# Altium PCB V2.PcbDoc
Units mil, origin at the board's own origin, x right, y up, seen from the top; angles counter-clockwise.
Board outline 1188.05 x 6359.78 mil, 2 copper layers (Top Layer, Bottom Layer); 71 components, 48 nets, 205 pads, 238 vias.
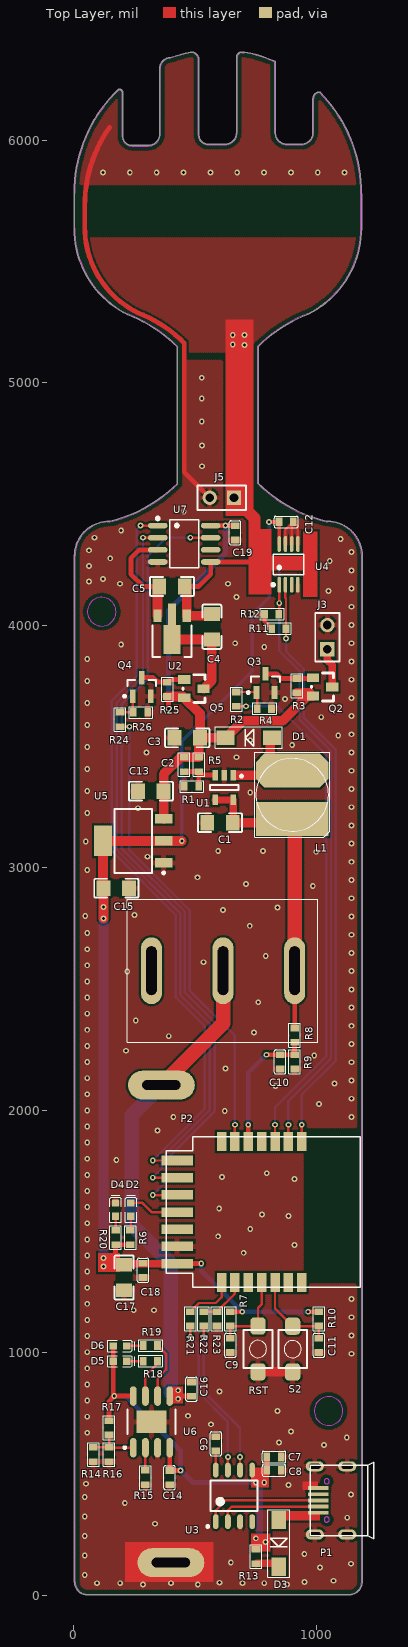
[diagram p0: Top Layer view]
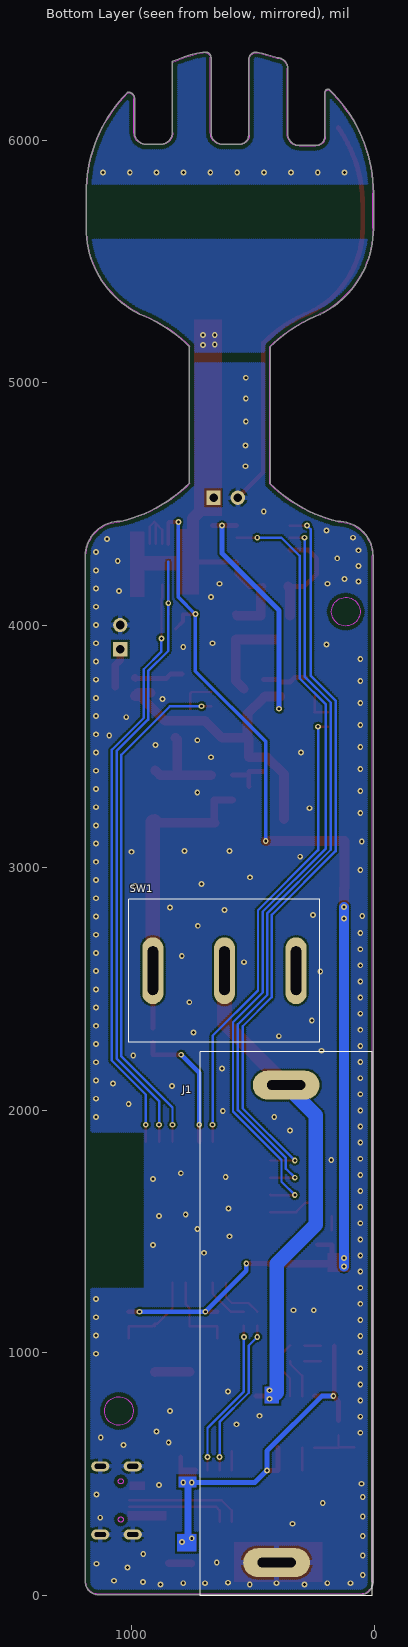
[diagram p1: Bottom Layer view, seen from below]

## Layer stack, top to bottom
Top Solder: solder mask 0.4, Solder Resist, Dk 3.5
Top Layer: signal copper 1.4
Dielectric 1: dielectric 12.6, FR-4, Dk 4.8
Bottom Layer: signal copper 1.4
Bottom Solder: solder mask 0.4, Solder Resist, Dk 3.5

## Board outline
4.17,4285.47 cw(c146.69,4285.47) 137.6,4427.7 cw(c138.77,4425.47) 138.77,4427.99 151.9,4427.99 ccw(c6.69,5007.56) 428.44,4584.34 428.44,5146.56 ccw(c6.69,4723.34) 222.52,5280.48 cw(c223.42,5282.83) 222.31,5280.58 cw(c398.47,5635.47) 2.26,5635.47 2.26,5780 cw(c594.77,5780.23) 186.02,6209.17 cw(c187.75,6207.35) 187.75,6209.86 cw(c187.75,6194.03) 203.59,6194.03 203.59,6013.93 ccw(c239.77,6013.93) 239.77,5977.74 308.55,5977.74 ccw(c308.55,6025.23) 356.04,6025.23 356.04,6294.85 cw(c358.14,6296.24) 355.62,6296.3 cw(c399.77,6295.23) 398.74,6339.38 cw(c594.77,5780.23) 483.13,6362.13 cw(c484.77,6360.23) 484.77,6362.74 cw(c484.77,6330.23) 517.29,6330.23 517.29,6020.23 ccw(c554.77,6020.23) 554.77,5982.74 624.77,5982.74 ccw(c624.77,6030.23) 672.26,6030.23 672.26,6340.23 cw(c694.77,6340.23) 694.77,6362.74 704.77,6362.74 cw(c704.77,6360.23) 705.24,6362.7 cw(c594.83,5780.56) 831.34,6323.83 cw(c830.34,6321.52) 832.85,6321.52 cw(c830.34,6321.52) 832.29,6319.94 832.29,6030.23 ccw(c879.77,6030.23) 879.77,5982.74 939.77,5982.74 ccw(c939.77,6030.23) 987.26,6030.23 987.26,6170.23 cw(c1014.77,6170.23) 1014.77,6197.74 cw(c1014.77,6195.23) 1017.08,6196.24 cw(c594.83,5780.56) 1187.35,5780.56 cw(c594.83,5780.56) 1187.34,5777.68 cw(c1185.05,5776.65) 1187.56,5776.65 1187.56,5636.9 cw(c791.35,5636.9) 967.52,5282 cw(c966.4,5284.25) 967.31,5281.91 ccw(c1183.14,4724.77) 761.39,5147.99 761.39,4585.76 ccw(c1183.14,5008.98) 1042.38,4428.31 cw(c1041.78,4425.87) 1043.14,4427.99 1047.79,4427.99 cw(c1047.79,4285.47) 1190.3,4285.47 1190.3,51.57 cw(c1187.79,51.57) 1190.07,50.51 cw(c1137.79,55.47) 1142.75,3.19 cw(c1141.69,5.47) 1141.69,2.96 56.69,2.96 cw(c56.69,55.47) 4.17,55.47

## Design rules (kind name [scope] priority, off if disabled: settings)
BoardOutlineClearance [All] p1: gap=10 except(0: Arc-SplitContinuation Track-SplitContinuation SMDPad-SplitContinuation THPad-SplitContinuation Via-SplitContinuation Fill-SplitContinuation Poly-SplitContinuation Region-SplitContinuation Text-SplitContinuation)
Clearance outline [InPoly vs OnLayer('Keep-Out Layer')] p1: gap=15
Clearance same-via [IsVia vs IsVia] p2: gap=0 except(3: SMDPad-Via; 6: Via-Via)
Clearance [All] p3: gap=8
ComponentClearance [All] p1: gap=0 collisioncheckmode=3 verticalgap=0 showdistances=FALSE
MinimumSolderMaskSliver [All] p1: minsoldermaskwidth=3
PolygonConnect IsPad [IsPad] p1: connectstyle=Relief reliefconductorwidth=20 reliefentries=4 polygonreliefangle="90 Angle" airgapwidth=10
PolygonConnect Other [All] p2: connectstyle=Direct reliefconductorwidth=10 reliefentries=4 polygonreliefangle="90 Angle" airgapwidth=10
RoutingVias [All] p1: holewidth=8 width=16 viastyle="Through Hole" minholewidth=7.87 minwidth=11.81 maxholewidth=23.62 maxwidth=39.37
SilkToSilkClearance [All] p1: silktosilkclearance=0
SilkToSolderMaskClearance [IsPad] p1: minsilkscreentomaskgap=0 clearancetoexposedcopper=TRUE
SolderMaskExpansion [All] p1: expansion=2
Width [All] p1: maxlimit=196.85 minlimit=6 preferedwidth=7
26 further rules are at their usual default settings.

## Components (designator, comment, footprint, x,y, rotation, side; value= is the part's Value field where it differs from the comment)
C1 "22uF" C1206 604.19,3185.47 r180 top
C2 "101" C0603 456.69,3425.47 r270 top
C3 "22uF" C1206 469.19,3535.47 r180 top
C4 "22uF" C1206 570.69,3993.47 r90 top
C5 "22uF" C1206 406.19,4159.47 r0 top
C6 "0.1uF/50V" C0603_GRM18 586.69,625 r90 top
C7 "0.1uF/50V" C0603_GRM18 826.69,570.47 r180 top
C8 "1uF/16V" C0603_GRM18 826.69,515.47 r180 top
C9 "0.1uF/50V" C0603_GRM18 646.69,1030.94 r270 top
C10 "0.1uF/50V" C0603_GRM18 851.69,2199.53 r90 top
C11 "0.1uF/50V" C0603_GRM18 1011.69,1030.94 r270 top
C12 "0.1uF/50V" C0603_GRM18 876.69,4425.47 r180 top
C13 "22uF" C1206 319.19,3315.47 r180 top
C14 "4.7uF/10V" C0603_GRM18 396.21,485.47 r90 top
C15 "22uF" C1206 176.69,2915.47 r0 top
C16 "4.7uF/10V" C0603_GRM18 486.69,850.47 r270 top
C17 "22uF" C1206 208.69,1310.47 r270 top
C18 "0.1uF/50V" C0603_GRM18 286.69,1340.47 r270 top
C19 "0.1uF/50V" C0603_GRM18 666.69,4380.47 r270 top
D1 "D-B140-13" XF-SS12C 818.69,3535.47 r180 top
D2 "LED_灯_黄" LED0603 236.69,1590.47 r90 top
D3 "D-B140-13" XF-SS12C 846.69,310.47 r270 top
D4 "LED_灯_蓝" LED0603 173.69,1590.47 r90 top
D5 "LED_灯_红" LED0603 191.69,965.47 r0 top
D6 "LED_灯_绿" LED0603 191.69,1028.47 r0 top
J1 "PAD" POW_5# 716.65,2241.77 r270 bottom locked
J3 "PAD" HDR1X2 1046.69,3900.47 r90 top
J5 "PAD" HDR1X2 661.69,4525.47 r180 top
L1 "4.7uH" CD73 901.69,3300.47 r90 top
P1 "MUBFRSG-7H-05B0" MIRCOUSB_5PIN-A 1061.84,391.65 r90 top
P2 "CBU" CBU-PCBA 661.69,1580.47 r270 top locked
Q2 "AO3401A" SOT-23 1026.69,3745.47 r270 top
Q3 "CJ2312" SOT23-3 791.69,3760.47 r90 top
Q4 "CJ2312" SOT23-3 281.69,3745.47 r90 top
Q5 "AO3401A" SOT-23 496.53,3737.82 r270 top
R1 "103" R0603 486.69,3335.47 r0 top
R2 "103" R0603 671.69,3695 r90 top
R3 "104" R0603 921.69,3750.47 r90 top
R4 "104" R0603 787.16,3655.47 r180 top
R5 "473" R0603 516.69,3425.47 r270 top
R6 "102" R0603 234.33,1475.47 r90 top
R7 "103" R0603 646.69,1140 r90 top
R8 "104" R0603 911.69,2309.53 r90 top
R9 "104" R0603 911.69,2200 r90 top
R10 "103" R0603 1011.69,1140 r90 top
R11 "103" R0603 846.69,3985.47 r180 top
R12 "103" R0603 817.16,4045.47 r180 top
R13 "0.1Ω" R0603 752.69,160.47 r270 top
R14 "NTC" R0603 81.69,580.94 r270 top
R15 "152" R0603 296.69,485.94 r270 top
R16 "RT2" R0603 146.69,580.94 r90 top
R17 "RT1" R0603 146.69,690.94 r270 top
R18 "102" R0603 316.69,965.47 r180 top
R19 "102" R0603 316.69,1030.47 r0 top
R20 "102" R0603 173.69,1475.47 r270 top
R21 "200R" R0603 481.69,1140.47 r90 top
R22 "15K" R0603 536.69,1140.47 r90 top
R23 "22K/1%" R0603 591.69,1140.47 r90 top
R24 "103" R0603 191.69,3610.94 r90 top
R25 "103" R0603 386.69,3735.47 r90 top
R26 "104" R0603 276.21,3640.47 r180 top
RST "TSY3420-250AH" SW-PB2_SMT-3X4 760.83,1015.98 r90 top
S2 "TSY3420-250AH" SW-PB2_SMT-3X4 903.69,1015.47 r90 top
SW1 "SW-SPDT" pow_switch 321.41,2575.47 r0 bottom locked
U1 "LM2733XMFX/NOPB" SOT23-5 621.69,3330.47 r270 top
U2 "AMS1117-3.3" SOT-89C 466.69,4038.47 r180 top
U3 "CH340N" SOP-8 661.69,410.47 r90 top
U4 "TMP75AIDGKR" VSSOP-8_L3.0-W3.0-P0.65-LS5.0-BL 886.69,4250.47 r0 top
U5 "BL1117" SOT-223 246.69,3110.47 r180 top
U6 "TP4056_C725790" ESOP-8 321.69,715.47 r90 top
U7 "X9C104SIZT1" SOIC-8_L4.9-W3.9-P1.27-LS6.0-BL 456.69,4335.47 r270 top

## Footprints (in the part's own frame and the unit in brackets; to place one, negate y for a bottom-side part, rotate by r counter-clockwise, add the part's x,y. Pads: shape width x height; smd on the part's side, far side on the other; paste and mask are expansions set on the pad)
C0603 [mm]
  rect 0.7x0.9 smd paste+0 mask+0.051: 1(-0.75,0) 2(0.75,0)
  silkscreen extent -1.25,-0.6 1.25,0.6, body extent -0.9,-0.5 0.9,0.5, height 1
C0603_GRM18 [mm] "适用Murata GRM15封装"
  rect 0.7x0.9 smd paste+0 mask+0.051: 1(-0.75,0) 2(0.75,0)
  Top Layer pour cut-out: -0.254,0.602 0.254,0.602 0.254,-0.602 -0.254,-0.602
  silkscreen extent -1.25,-0.6 1.25,0.6, body extent -0.8,-0.4 0.8,0.4, height 0.8
C1206 [mil]
  rect 57x65 smd mask+2: 1(-52.5,0) 2(52.5,0)
  Top Layer pour cut-out: -18.07,39 18.07,39 18.07,-39 -18.07,-39
  silkscreen extent -91,-39 91,39, body extent -64,-32 64,32, height 75
CBU-PCBA [mm]
  rect 2x1 smd mask+0.051: 1(-7.377,7.1) 2(-7.377,5.7) 3(-7.377,4.3) 4(-7.377,2.9) 5(-7.377,1.5) 6(-7.377,0.1) 7(-7.377,-1.3) 15(7.377,-1.3) 16(7.377,0.1) 17(7.377,1.5) 18(7.377,2.9) 19(7.377,4.3) 20(7.377,5.7) 21(7.377,7.1)
  rect 1x3.3 smd mask+0.051: 8(-5.4,-5.95) 9(-3.6,-5.95) 10(-1.8,-5.95) 11(0,-5.95) 12(1.8,-5.95) 13(3.6,-5.95) 14(5.4,-5.95)
  silkscreen extent -7.9,-7.1 7.9,13.2
CD73 [mil]
  rect 140x300 smd: 1(-100,0)
  oct 140x300 smd: 2(100,0)
  silkscreen extent -175,-155 175,155
ESOP-8 [mm]
  oval 2.05x0.7 smd mask+0.051: 1(-2.7,1.905) 2(-2.7,0.635) 3(-2.7,-0.635) 4(-2.7,-1.905) 5(2.7,-1.905) 6(2.7,-0.635) 7(2.7,0.635) 8(2.7,1.905)
  rect 2.34x3.12 smd paste-2.6 mask+0.051: 9(0,0)
  silkscreen extent -2.82,-2.5 1.28,2.93, body extent -3.02,-2.51 3.02,2.51, height 1.6
HDR1X2 [mm] "Connector; Header; 2 Position"
  rect 1.5x1.5 hole 0.9: 1(0,0)
  round 1.5 hole 0.9: 2(2.54,0)
  silkscreen extent -1.27,-1.27 3.81,1.27
LED0603 [mil]
  rect 30x30 smd: 1(-27.5,0) 2(27.5,0)
  Top Layer pour cut-out: -8,20 8,20 8,-20 -8,-20
  silkscreen extent -51,-24 60,24, body extent -31,-16 31,16, height 15
MIRCOUSB_5PIN-A [mm]
  rect 0.4x2.15 smd mask+0.051: 1(-1.3,1.35) 2(-0.65,1.35) 3(0,1.35) 4(0.65,1.35) 5(1.3,1.35)
  oval 1.05x1.9 hole 0.5 slot 1.2 at 90 deg: G1(-3.575,1.7) G2(-3.575,-1.7) G3(3.575,-1.7) G4(3.575,1.7)
  Keep-Out Layer circle w0.076: c2,0.45 r0.275
  Keep-Out Layer circle w0.076: c-2,0.45 r0.275
  silkscreen extent -4,-4.45 4,2.17, body extent -3.93,-4.37 3.94,2.14, height 2.69
POW_5# [mm]
  oval 3x7 hole 1 slot 4 at 90 deg: 1(3.5,9) 2(53.5,8)
  silkscreen extent 0,0 57,18
pow_switch [mm]
  oval 2.2x7 hole 1.1 slot 5.1 at 90 deg: 1(0,0) 2(7.5,0) 3(15,0)
  silkscreen extent -2.5,-7.5 17.5,7.5
R0603 [mm]
  rect 0.7x0.9 smd paste+0 mask+0.051: 1(-0.75,0) 2(0.75,0)
  Top Layer pour cut-out: -0.315,-0.602 -0.315,0.602 0.324,0.602 0.324,-0.602
  silkscreen extent -1.25,-0.6 1.25,0.6, body extent -0.8,-0.4 0.8,0.4, height 0.45
SOIC-8_L4.9-W3.9-P1.27-LS6.0-BL [mm]
  oval 0.588x2.045 smd: 1(-1.905,-2.773) 2(-0.635,-2.773) 3(0.635,-2.773) 4(1.905,-2.773) 5(1.905,2.773) 6(0.635,2.773) 7(-0.635,2.773) 8(-1.905,2.773)
  silkscreen extent -2.8,-2.92 2.53,1.52
SOP-8 [mm]
  oval 1.55x0.6 smd: 1(-2.7,1.905) 2(-2.7,0.635) 3(-2.7,-0.635) 4(-2.7,-1.905) 5(2.7,-1.905) 6(2.7,-0.635) 7(2.7,0.635) 8(2.7,1.905)
  silkscreen extent -3.32,-2.45 1.6,2.87, body extent -3,-2.5 3,2.5, height 1.75
SOT23-3 [mm] "SOT23"
  rect 1.4x0.6 smd mask+0.051: 1(-0.975,0.95) 2(-0.975,-0.95) 3(0.975,0)
  silkscreen extent -1.1,-1.5 0.7,1.92, body extent -1.4,-1.45 1.4,1.45, height 1.2
SOT23-5 [mm] "SOT23-5"
  rect 1.1x0.6 smd mask+0.051: 1(-1.3,0.95) 2(-1.3,0) 3(-1.3,-0.95) 4(1.3,-0.95) 5(1.3,0.95)
  silkscreen extent -1.32,-1.5 0.25,1.93, body extent -1.4,-1.45 1.4,1.45, height 1.2
SOT-23 [mil]
  rect 36x50 smd: D(0.35,40.16) G(-37.65,-39.84) S(37.35,-39.84)
  silkscreen extent -58,-45 57,45
SOT-89C [mil]
  rect 34x50 smd: 1(0,0) 3(120,0)
  rect 70x120 smd: 2(60,98)
  rect 34x100 smd: 2(60,0)
  silkscreen extent -20,40 140,170
SOT-223 [mm] "SOT223, 4-Leads, Body 6.50x7.00mm"
  rect 1.85x1 smd: 1(-3.175,2.3) 2(-3.175,0) 3(-3.175,-2.3)
  rect 1.85x3.2 smd: 4(3.175,0)
  silkscreen extent -3.3,-3.35 1.95,3.47, body extent -3.48,-3.25 3.48,3.25, height 1.7
SW-PB2_SMT-3X4 [mm] "3x6x2.5（L*W*H）"
  rrect50% 1.8x1.6 smd: 1(-2.4,0) 2(2.4,0)
  silkscreen extent -2,-1.5 2,1.5, body extent -2.95,-1.5 3.01,1.5, height 2
VSSOP-8_L3.0-W3.0-P0.65-LS5.0-BL [mm]
  oval 0.364x1.662 smd: 1(-0.975,-2.131) 2(-0.325,-2.131) 3(0.325,-2.131) 4(0.975,-2.131) 5(0.975,2.131) 6(0.325,2.131) 7(-0.325,2.131) 8(-0.975,2.131)
  silkscreen extent -1.76,-2.28 1.58,1.07
XF-SS12C [mil]
  rect 74.8x60 smd: A(0,0) K(192,0)
  silkscreen extent -43,-46 235,44

## Part data
C1 C3 C4 C5 C13 C15 C17: library part C1
C2: library part CAP, "Capacitor"
C6 C7: library part 1.02.05.00834, "无极性电容"
C8: library part 1.02.03.00181, "无极性电容"
C9 C10 C11 C12 C18 C19: library part 1.02.05.00150, "无极性电容"
C14 C16: library part 1.02.05.00710, "无极性电容"
D1 D3: library part DIODE, "Diode"
D2 D4 D5 D6: library part 1.06.02.00449, "LED"
J1 J3 J5: library part CON2, "Connector"
L1: library part Inductor, "Inductor"
P1: library part 1.16.99.00399, "USB"
P2: library part 0110
Q2 Q5: library part MOSFET-P, "MOSFET-P"
Q3 Q4: library part 1.06.11.00008, "N-Channel MOSFET"
R1 R2 R3 R4 R5 R6 R7 R8 R9 R10 R11 R12 R13 R14 R15 R16 R17 R18 R19 R20 R24 R25 R26: library part RES-1, "RES"
R21: library part 1.01.01.00808, "电阻"
R22: library part 1.01.01.01301, "电阻"
R23: library part 1.01.01.01030, "电阻"
RST S2: library part 1.13.04.00024, "2pin轻触开关（无固定脚）"
SW1: "SPDT Subminiature Toggle Switch, Right Angle Mounting, Vertical Actuation"
U1: library part LM2733, "LM2733"
U2: library part WYK
U5: library part 1.05.99.00236, "线性稳压源"

## Via types
v1: diameter 24, hole 12, Top Layer to Bottom Layer, tented both sides, 238 vias

## Nets (pads, with @x,y where several pads share a name; then routed paths per layer and width w, separated by ;. In a path a pad name is that pad's centre, name@x,y a point inside that pad or via, vN(x,y) a via of type N, cw(c..) or ccw(c..) an arc to the next point about the centre after c; other vN are vias at no path point)
ADC: C10.2 P2.5 R8.1 R9.2 | length 556.1
  Top Layer w20: P2.5 v1(720.74,1940.47) ; v1(795.27,2229.06) C10.2 911.21,2229.06 R9.2 R8.1
  Bottom Layer w20: v1(720.74,1940.47) 720.74,2154.53 v1(795.27,2229.06)
D+: P1.3 U3.1 | length 485.4
  Top Layer w10: U3.1 586.69,350.47 627.87,391.65 P1.3
D-: P1.2 U3.2 | length 424.8
  Top Layer w10: U3.2 636.69,350.47 652.28,366.06 P1.2
GND: C1.2 C3.2 C6.2 C7.1 C8.1 C9.2 C10.1 C11.2 C12.1 C13.2 C14.1 C15.2 C16.1 C17.2 C18.2 C19.2 D4.2 J1.2 J3.2 J5.2 P1.5 P1.G1 P1.G2 P1.G3 P1.G4 P2.13 Q3.2 Q4.2 R1.1 R4.1 R9.1 R14.2 R15.2 R16.1 R23.1 R26.1 RST.1 S2.1 U1.2 U3.3 U4.4 U4.5 U4.6 U4.7 U5.1 U6.3 U6.9 U7.4 | length 2210.5
  Top Layer w10: U4.7 873.89,4393.15 C12.1@899.48,4418.74 ; U4.6 C12.1@899.48,4418.74 ; U4.5 925.07,4406.61 C12.1 C12.1@899.48,4418.74
  Top Layer w20: 147.92,6051.61 ccw(c606.69,5730.47) 46.69,5730.47 46.69,5640.47 ccw(c440.39,5640.47) 265.34,5287.83 cw(c66.66,4774.97) 455.57,5163.87 ; 456.69,5163.87 456.69,4630.47 J5.2
  Top Layer w40: RST.1 903.17,921.5 S2.1
  other v1: 286.69,45.47 512.69,45.47 880.69,45.47 96.69,50.47 192.69,50.47 401.69,50.47 696.69,50.47 786.69,50.47 601.69,52.47 952.69,55.47 1071.69,60.47 46.69,84.47 1016.69,115.47 1144.69,130.47 648.69,135.47 46.69,164.72 951.69,170.47 46.69,244.97 336.69,295.47 1128.69,320.47 46.69,325.22 211.69,380.47 46.69,405.47 1144.69,415.47 886.69,455.47 51.69,460.47 1032.69,620.47 846.69,630.47 1126.69,650.47 56.69,670.47 896.69,675.47 566.69,705.47 56.69,736.92 472.69,740.47 840.69,760.47 56.69,803.38 601.69,840.47 56.69,869.83 56.69,936.28 1146.69,996.47 56.69,1002.73 56.69,1069.18 1146.69,1071.57 56.69,1135.63 1146.69,1146.68 248.69,1175.47 331.69,1175.47 56.69,1202.09 1146.69,1221.78 56.69,1268.54 56.69,1334.99 56.69,1401.44 701.69,1412.47 911.69,1444.47 56.69,1467.89 596.69,1480.47 728.69,1510.47 56.69,1534.34 886.69,1564.47 776.69,1570.47 600.69,1595.47 56.69,1600.79 56.69,1667.25 911.69,1716.47 611.69,1724.47 56.69,1733.7 796.69,1740.47 176.69,1795.47 56.69,1800.15 56.69,1866.6 346.69,1916.47 56.69,1933.05 411.69,1972.47 1146.69,1972.8 623.65,1996.47 56.69,1999.5 1011.69,2025.47 1146.69,2047.9 56.69,2065.96 832.69,2100.47 1076.69,2110.47 1146.69,2123 56.69,2132.41 626.69,2172.47 56.69,2198.86 1146.69,2198.1 992.69,2225.47 216.69,2245.47 56.69,2265.31 1146.69,2273.21 392.69,2305.47 744.69,2320.47 56.69,2331.76 1146.69,2348.31 256.69,2370.47 56.69,2398.21 1146.69,2423.41 761.69,2445.47 56.69,2464.67 1146.69,2498.51 56.69,2531.12 221.69,2572.47 1146.69,2573.61 56.69,2597.57 536.69,2610.47 792.69,2635.47 1146.69,2648.72 56.69,2664.02 1146.69,2723.82 56.69,2730.47 726.69,2760.47 1146.69,2798.92 48.69,2800.47 251.69,2804.47 616.69,2825.47 841.69,2836.47 1146.69,2874.02 986.69,2924.47 711.69,2932.47 1146.69,2949.12 511.69,2960.47 56.69,2990.47 1146.69,3024.23 304.69,3045.47 1000.69,3065.47 596.69,3068.47 781.69,3068.47 1146.69,3099.33 50.73,3108.47 1146.69,3174.43 56.69,3225.47 266.69,3245.47 1146.69,3249.53 728.69,3310.47 56.69,3316.19 1146.69,3324.63 1146.69,3399.74 56.69,3406.9 671.69,3455.47 1146.69,3474.84 301.69,3475.47 56.69,3497.61 901.69,3505.47 728.69,3525.47 1091.69,3545.47 1146.69,3549.94 56.69,3588.33 1021.69,3620.47 1146.69,3625.04 56.69,3679.04 872.69,3695.47 1146.69,3700.14 56.69,3769.76 1146.69,3775.25 1146.69,3850.35 56.69,3860.47 786.69,3910.47 196.69,3920.47 666.69,3925.47 1146.69,3925.45 1146.69,4000.55 1146.69,4075.65 671.69,4116.47 1051.69,4140.47 1146.69,4150.76 191.69,4170.47 636.69,4170.47 64.69,4180.47 121.69,4190.47 1146.69,4225.86 64.69,4244.47 1056.69,4265 151.69,4275.47 1146.69,4300.96 64.69,4308.47 1101.69,4355.47 86.69,4360.47 196.69,4390.47 455,4468.47 530,4655 530,4740.47 528.69,4840 528.69,4935 528.69,5020 121.69,5865.47 232.35,5865.47 343.02,5865.47 453.69,5865.47 564.35,5865.47 675.02,5865.47 785.69,5865.47 896.35,5865.47 1007.02,5865.47 1117.69,5865.47
NetC1_1: C1.1 L1.1 R8.2 SW1.3 U1.4 U1.5 | length 1286.6
  Top Layer w20: C1.1 C1.1@659.09,3187.87 ; R8.2 911.96,2339.33 SW1.3
  Top Layer w30: U1.4 U1.5 C1.1@659.09,3187.87
  Top Layer w40: C1.1 886.69,3185.47 L1.1 L1.1@911.96,3190.2
  Top Layer w60: SW1.3 L1.1@911.96,3190.2
NetC2_2: C2.2 R1.2 R5.2 U1.3 | length 188.8
  Top Layer w20: C2.2 R5.2 516.69,3380.47 ; R1.2 516.69,3335.94 516.69,3380.47 ; U1.3 517.87,3381.65 516.69,3380.47
NetC6_1: C6.1 U3.8 | length 78.7
  Top Layer w10: U3.8 C6.1
NetD1_A: D1.A L1.2 U1.1 | length 394.5
  Top Layer w40: 671.69,3381.65 L1.2@811.69,3381.65 ; D1.A 811.69,3528.47 L1.2@811.69,3381.65 ; L1.2 882.87,3381.65 L1.2@811.69,3381.65
NetD2_1: D2.1 R6.2 | length 58.9
  Top Layer w10: R6.2 236.69,1507.35 D2.1
NetD3_A: D3.A P1.1
NetD3_K: D3.K R13.2 | length 94.6
  Top Layer w30: R13.2 754.21,132.47 D3.K@846.69,132.47
NetD4_1: D4.1 R20.1 | length 58
  Top Layer w10: R20.1 D4.1
NetD5_2: D5.2 R18.2 | length 68
  Top Layer w10: D5.2 R18.2
NetD6_2: D6.2 R19.1 | length 68.8
  Top Layer w10: D6.2 285.16,1028.47 R19.1
NetQ2_G: Q2.G Q3.3 R3.2 | length 204.3
  Top Layer w20: Q3.3 838.3,3798.86 857.16,3780 Q2.G@983.72,3780
  Top Layer w30: Q2.G@983.72,3780 Q2.G
NetQ3_1: Q3.1 R2.2 R4.2 | length 151.6
  Top Layer w10: R2.2 751.84,3724.53 Q3.1 757.63,3718.74 R4.2
NetQ4_1: Q4.1 R24.2 R26.2 | length 121.2
  Top Layer w10: R24.2 241.88,3640.47 R26.2@244.28,3642.87 ; Q4.1 R26.2@244.28,3642.87 ; R26.2 R26.2@244.28,3642.87
NetQ4_3: Q4.3 Q5.G R25.2 | length 186.8
  Top Layer w20: Q4.3 328.3,3783.86 346.69,3765.47 387.16,3765.47 397.16,3775.47 Q5.G
NetR14_1: R14.1 R16.2 R17.2 U6.1 | length 216.5
  Top Layer w10: R14.1 R16.2 ; R17.2 R16.2 ; U6.1 147.99,609.17 R16.2
NetR15_1: R15.1 U6.2 | length 93.7
  Top Layer w10: R15.1 U6.2
NetR18_1: R18.1 U6.7 | length 164.2
  Top Layer w10: U6.7 296.69,905.47 346.21,955 R18.1
NetR19_2: R19.2 U6.6 | length 237.9
  Top Layer w10: R19.2 381.69,995 381.69,930.47 346.69,895.47 U6.6
NetR21_1: R21.1 U3.7 | length 658.4
  Top Layer w10: v1(481.69,1065.47) R21.1 ; U3.7 v1(636.69,570.47)
  Bottom Layer w10: v1(481.69,1065.47) 516.69,1030.47 516.69,835.47 636.69,715.47 v1(636.69,570.47)
NetR22_1: R22.1 U3.6 | length 656.3
  Top Layer w10: v1(536.69,1065.47) R22.1 ; U3.6 v1(686.69,570.47)
  Bottom Layer w10: v1(536.69,1065.47) 536.69,840.93 686.69,690.93 v1(686.69,570.47)
R+: C5.1 U2.3 U7.3 | length 452.4
  Top Layer w20: U7.3 271.69,4310.47 236.69,4275.47 236.69,4210.47 287.69,4159.47 C5.1
  Top Layer w40: U2.3 346.69,4152.47 C5.1
R-: C4.2 C5.2 J5.1 U2.1 U7.5 | length 821.2
  Top Layer w20: C5.2 515.69,4159.47 565.84,4209.63 U7.5 746.69,4260.47
  Top Layer w30: C5.2 C5.2@466.69,4151.47 ; C4.2@563.19,4038.47 C4.2
  Top Layer w40: C5.2@466.69,4151.47 U2.1 C4.2@563.19,4038.47
  Top Layer w50: J5.1 746.69,4440.47 746.69,4330.47
  other v1: 704.69,5155.47 656.69,5156.47 656.69,5195.47 704.69,5195.47
R_CS: P2.10 U7.7 | length 3335.3
  Top Layer w10: v1(326.69,1650.47) 426.57,1650.47 P2.10 ; v1(481.69,4360.47) U7.7
  Bottom Layer w10: v1(326.69,1650.47) 381.69,1705.47 381.69,1795.47 581.69,1995.47 581.69,2362.85 458.69,2485.85 458.69,2819.38 198.69,3079.38 198.69,3672.22 306.69,3780.22 306.69,4285.47 381.69,4360.47 v1(481.69,4360.47)
R_INC: P2.8 U7.1 | length 3085.6
  Top Layer w10: v1(276.69,4410.47) U7.1 ; v1(326.69,1793.07) P2.8
  Bottom Layer w10: v1(276.69,4410.47) 261.69,4395.47 261.69,3791.79 158.69,3688.79 158.69,3068.47 421.69,2805.47 421.69,2466.28 541.69,2346.28 541.69,2008.07 v1(326.69,1793.07)
R_UD: P2.9 U7.2 | length 3100.6
  Top Layer w10: v1(286.69,4360.47) U7.2 ; v1(326.69,1722.2) P2.9
  Bottom Layer w10: v1(286.69,4360.47) 286.69,3788.5 178.69,3680.5 178.69,3073.93 439.69,2812.93 439.69,2476.56 561.69,2354.56 561.69,2000.93 363.69,1802.93 363.69,1759.2 v1(326.69,1722.2)
RESETB: C9.1 P2.18 R7.1 RST.2 | length 349.9
  Top Layer w10: C9.1 R7.1 RST.2 760.83,1184.61 775.86,1199.65 P2.18
RXD: P2.16 R22.2 R23.2 | length 205.7
  Top Layer w10: R22.2 R23.2 665.62,1243.94 P2.16
S_HEAT: P2.3 R2.1 | length 2134.7
  Top Layer w10: R2.1 v1(711.69,3665.47) ; P2.3 v1(830.98,1940.47)
  Bottom Layer w10: v1(711.69,3665.47) 841.69,3665.47 1041.69,3465.47 1041.69,2222.04 830.98,2011.33 v1(830.98,1940.47)
S_KEY: C11.1 P2.19 R10.1 S2.2 | length 378.5
  Top Layer w10: P2.19 830.98,1182.67 893.17,1120.47 S2.2@903.69,1120.47 ; S2.2 S2.2@903.69,1120.47 ; C11.1 R10.1 913.69,1110.47 S2.2@903.69,1120.47
S_LED: D2.2 P2.11 | length 206.3
  Top Layer w10: D2.2 284.19,1617.97 321.69,1580.47 P2.11
S_TONGUE: P2.6 R24.1 | length 1929.7
  Top Layer w10: R24.1 v1(230.74,3581.42) ; P2.6 v1(665.62,1940.47)
  Bottom Layer w10: v1(230.74,3581.42) 230.74,3072.78 478.69,2824.84 478.69,2494.13 665.62,2307.19 v1(665.62,1940.47)
T_SCL: P2.1 R11.1 U4.2 | length 2439.9
  Top Layer w10: U4.2 873.89,4113.27 876.21,4110.94 876.21,3986.22 R11.1@875.47,3986.22 ; R11.1 876.21,3945.94 v1(876.69,3945.47) ; P2.1 v1(941.21,1940.47)
  Bottom Layer w10: v1(876.69,3945.47) 876.69,3890.93 949.69,3817.93 949.69,3617.93 1081.69,3485.93 1081.69,2205.47 941.21,2065 v1(941.21,1940.47)
T_SDA: P2.2 R12.1 U4.1 | length 2767.5
  Top Layer w10: R12.1 848.3,4047.09 v1(848.3,4090.47) U4.1 ; P2.2 v1(886.1,1940.47)
  Bottom Layer w10: 848.3,4185.47 v1(848.3,4090.47) ; 848.3,4260.47 v1(848.3,4090.47) ; v1(886.1,1940.47) 886.1,2038.17 1061.69,2213.76 1061.69,3480.47 931.69,3610.47 931.69,3810.47 848.3,3893.86 v1(848.3,4090.47)
TL_A1: P2.7
TL_B1: P2.15 R21.2 | length 214.1
  Top Layer w10: R21.2 517.16,1205.47 586.69,1205.47 610.5,1229.29 P2.15
TL_C4: P2.17
TL_D4: P2.20
TL_SWS: P2.4
V_5V: C2.1 C3.1 C13.1 C19.1 D1.K Q2.S Q5.S R3.1 R5.1 R25.1 U5.3 U7.8 | length 2317.9
  Top Layer w20: R25.1 391.69,3700.94 v1(391.69,3655.47) ; C3.1@516.69,3530.47 C3.1 ; U7.8 v1(626.69,4410.47) C19.1@666.69,4410.47
  Top Layer w40: U5.3 C13.1 371.69,3385.47 441.21,3455 R5.1 C3.1@516.69,3530.47 ; R25.1 451.21,3705.94 Q5.S 521.69,3635.47 C3.1 D1.K 696.69,3605.47 861.69,3605.47 964.34,3708.12 Q2.S 974.02,3720.94 R3.1
  Bottom Layer w20: v1(391.69,3655.47) 391.69,4060.47 626.69,4295.47 v1(626.69,4410.47)
V_BAT: C16.2 J1.1 SW1.2 U6.5 | length 2070.1
  Top Layer w20: U6.5 C16.2@486.69,821.77
  Top Layer w60: J1.1 616.69,2358.35 SW1.2
  Bottom Layer w60: J1.1@362.32,2100.47 240.69,1978.84 240.69,1527.47 401.69,1366.47 401.69,835.47 416.69,820.47
  other v1: 431.69,810.47 431.69,845.47
V_HEAT: J3.1 Q2.D | length 163.7
  Top Layer w30: J3.1 1046.69,3855.47 1066.84,3835.31 Q2.D
V_IN: C7.2 C8.2 C14.2 D5.1 D6.1 R13.1 R17.1 U3.5 U6.4 U6.8 | length 1632.9
  Top Layer w20: R17.1 146.69,800.47 v1@164.19,817.97 ; D6.1 D5.1 v1@164.19,817.97 ; U6.8 v1(167.99,821.77) v1@164.19,817.97 ; C14.2 v1(441.69,515) ; C14.2@396.69,520.47 U6.4 ; U3.5 795.86,516.77 C8.2 C7.2
  Bottom Layer w20: v1(167.99,821.77) 215.39,821.77 441.69,595.47 v1(441.69,515) 491.21,465.47 731.69,465.47
  Bottom Layer w30: 766.69,240.47 766.69,465.47
  other v1: 791.69,220.47 751.69,235.47 751.69,465.47 786.69,465.47
V_TONGUE: C4.1 Q5.D U2.2 | length 381.8
  Top Layer w40: U2.2@406.69,3940.47 570.19,3940.47 C4.1 570.69,3771.47 Q5.D
VDD: C12.2 C15.1 C17.1 C18.1 P2.14 R6.1 R7.2 R10.2 R11.2 R12.2 R20.2 U4.8 U5.2 U5.4 | length 4974
  Top Layer w10: C12.2 C12.2@848.3,4424.33
  Top Layer w15: v1(736.69,4045.47) R12.2 787.63,4015 R11.2 ; v1(806.69,4425.47) C12.2 ; U4.8 C12.2@848.3,4424.33
  Top Layer w20: C17.1@176.69,1364.47 180.09,1367.87 173.69,1374.28 R20.2 R6.1 ; P2.14 v1(526.69,1367.87) ; R7.2 v1(695.74,1169.53) ; v1(967.63,1169.53) R10.2
  Top Layer w30: C17.1@180.09,1367.87 P2.14
  Top Layer w40: v1(124.19,2790.47) v1(124.19,2837.97) C15.1 121.69,2917.97 U5.4 U5.2 v1(446.69,3110.47)
  Bottom Layer w15: v1(446.69,3110.47) 446.69,3520.47 736.69,3810.47 v1(736.69,4045.47) 806.69,4115.47 v1(806.69,4425.47)
  Bottom Layer w20: v1(526.69,1367.87) 526.69,1338.58 v1(695.74,1169.53) v1(967.63,1169.53)
  Bottom Layer w40: v1(124.19,1355.47) v1(124.19,1390.47) v1(124.19,2790.47) v1(124.19,2837.97)
pads on no net: P1.4 P2.12 P2.21 SW1.1 U3.4 U4.3 U7.6

## Polygon pours and split planes (outlines as drawn)
GND on Top Layer "Top Layer-No Net" (hatched 90Degree grid 0 track 8, remove dead copper, pour order 8): -25.09,6405 1206.69,6405 1206.69,5815.47 -11.05,5815.47
R- on Top Layer "Top Layer-No Net" (hatched 90Degree grid 0 track 8, remove dead copper, pour order 10): 16.69,5595.47 1196.69,5595.47 1196.69,5125.47 16.69,5125.47
GND on Top Layer "Top Layer-No Net" (hatched 90Degree grid 0 track 8, remove dead copper, pour order 4): 6.69,5090.47 6.69,0.47 1191.69,0.47 1191.69,5090.47
GND on Bottom Layer "Top Layer-No Net" (hatched 90Degree grid 0 track 8, remove dead copper, pour order 6): 26.69,5080.47 26.69,5.47 1181.69,5.47 1181.69,5080.47
R- on Bottom Layer "Top Layer-No Net" (hatched 90Degree grid 0 track 8, remove dead copper, pour order 12): 16.69,5590.47 1196.69,5590.47 1196.69,5126.47 16.69,5126.47
GND on Bottom Layer "Top Layer-No Net" (hatched 90Degree grid 0 track 8, remove dead copper, pour order 14): -24.56,6385 1206.69,6385 1206.69,5817.47 -11.05,5817.47

## Keep-outs
Keep-Out Layer:
  circle w5: c116.69,4055.47 r59.06
  circle w5: c1051.69,760.47 r59.06
  lines w5: 61.69,5.47 1141.69,5.47 ; 96.69,5.47 56.69,5.47 cw(c56.69,55.47) 6.69,55.47 6.69,4285.47 cw(c146.69,4285.47) 146.69,4425.47 ; 138.77,4425.47 152.21,4425.47 ccw(c6.69,5007.56) 430.95,4583.29 430.95,5147.61 ccw(c6.69,4723.34) 223.42,5282.83 cw(c398.47,5635.47) 4.77,5635.47 4.77,5780 cw(c594.77,5780.23) 187.75,6207.35 cw(c187.75,6194.03) 201.07,6194.03 201.07,6193.93 201.07,6170.23 201.07,6013.93 ccw(c239.77,6013.93) 239.77,5975.23 ; 358.14,6296.24 cw(c399.77,6295.23) 399.2,6336.87 cw(c594.77,5780.23) 484.83,6359.89 ; 358.55,6285.23 358.55,6025.23 ; 358.55,6296.23 358.55,6025.23 ; 484.77,6360.23 cw(c484.77,6330.23) 514.77,6330.23 514.77,6020.23 ccw(c554.77,6020.23) 554.77,5980.23 624.77,5980.23 ccw(c624.77,6030.23) 674.77,6030.23 674.77,6340.23 cw(c694.77,6340.23) 694.77,6360.23 704.77,6360.23 cw(c594.83,5780.56) 830.34,6321.52 ; 829.77,6320.23 829.77,6030.23 ccw(c879.77,6030.23) 879.77,5980.23 939.77,5980.23 ccw(c939.77,6030.23) 989.77,6030.23 989.77,6170.23 cw(c1014.77,6170.23) 1014.77,6195.23 ; 1014.65,6195.11 cw(c594.83,5780.56) 1184.82,5776.65 ; 1041.69,4425.47 1047.79,4425.47 cw(c1047.79,4285.47) 1187.79,4285.47 1187.79,51.57 ; 1041.78,4425.87 cw(c1183.14,5008.98) 758.87,4584.72 758.87,5149.03 cw(c1183.14,4724.77) 966.4,5284.25 ccw(c791.35,5636.9) 1185.05,5636.9 1185.05,5776.65 ; 1137.79,5.47 ccw(c1137.79,55.47) 1187.79,55.47 1187.79,100.47 ; 239.77,5975.23 308.55,5975.23 ; 239.77,5975.23 308.55,5975.23 ; 308.55,5975.23 ccw(c308.55,6025.23) 358.55,6025.23

## Other copper
Top Layer:
  rectangle net V_IN: 731.69,445.47 806.69,515.47
  rectangle net GND: 944.69,435.47 1008.69,470.47
  rectangle net GND: 211.69,55.47 576.69,220.47
  rectangle net R-: 721.69,4125.47 816.69,4395.47
  rectangle net R-: 946.69,4115.47 1006.69,4385.47
  rectangle net VDD: 101.69,1332.47 191.69,1412.47
  rectangle net V_BAT: 396.69,790.47 451.69,860.47
  rectangle net V_IN: 731.69,180.47 811.69,255.47
  rectangle net NetD3_A: 856.69,308.47 1016.69,348.47
  rectangle net R-: 756.69,4225.47 991.69,4285.47
  rectangle net R-: 626.69,4450.47 741.69,5260.47
  pour cut-out: 1181.69,1927.97 1181.69,1282.97 946.69,1282.97 946.69,1927.97
Bottom Layer:
  rectangle net V_IN: 731.69,445.47 806.69,490.47
  rectangle net V_BAT: 392.69,790.47 451.69,860.47
  rectangle net V_IN: 731.69,180.47 811.69,252.47
  pour cut-out: 946.69,1910.47 946.69,1265.47 1181.69,1265.47 1181.69,1910.47

## Silkscreen, mask and mechanical layers (free items; w line width, h text height)
Top Overlay:
  lines w5: 221.69,2280.47 1006.69,2280.47 1006.69,2870.47 221.69,2870.47 221.69,2280.47
Top Solder:
  rectangle: 1.69,5895 1191.69,6380
  region: 66.69,5600.47 1159.61,5600.47 cw(c1159.61,5583.4) 1171.69,5595.47 1196.69,5595.47 1196.69,5230.47 406.69,5230.47 361.69,5260.47 326.69,5280.47 306.69,5290.47 271.69,5305.47 251.69,5315.47 226.69,5330.47 201.69,5350.47 181.69,5365.47 156.69,5390.47 141.69,5410.47 111.69,5455.47 101.69,5475.47 81.69,5520.47 76.69,5545.47 71.69,5565.47
Bottom Solder:
  rectangle: 1.69,5890 1191.69,6380
  rectangle: 6.69,5230.47 1196.69,5590.47